# Altium PCB Projekat.PcbDoc
Units mm, origin at the board's own origin, x right, y up, seen from the top; angles counter-clockwise.
Board outline 89.78 x 109.95 mm, 2 copper layers (F.Cu, B.Cu); 68 components, 66 nets, 222 pads, 20 vias.
Unrouted connection lines stored in the file: 3.
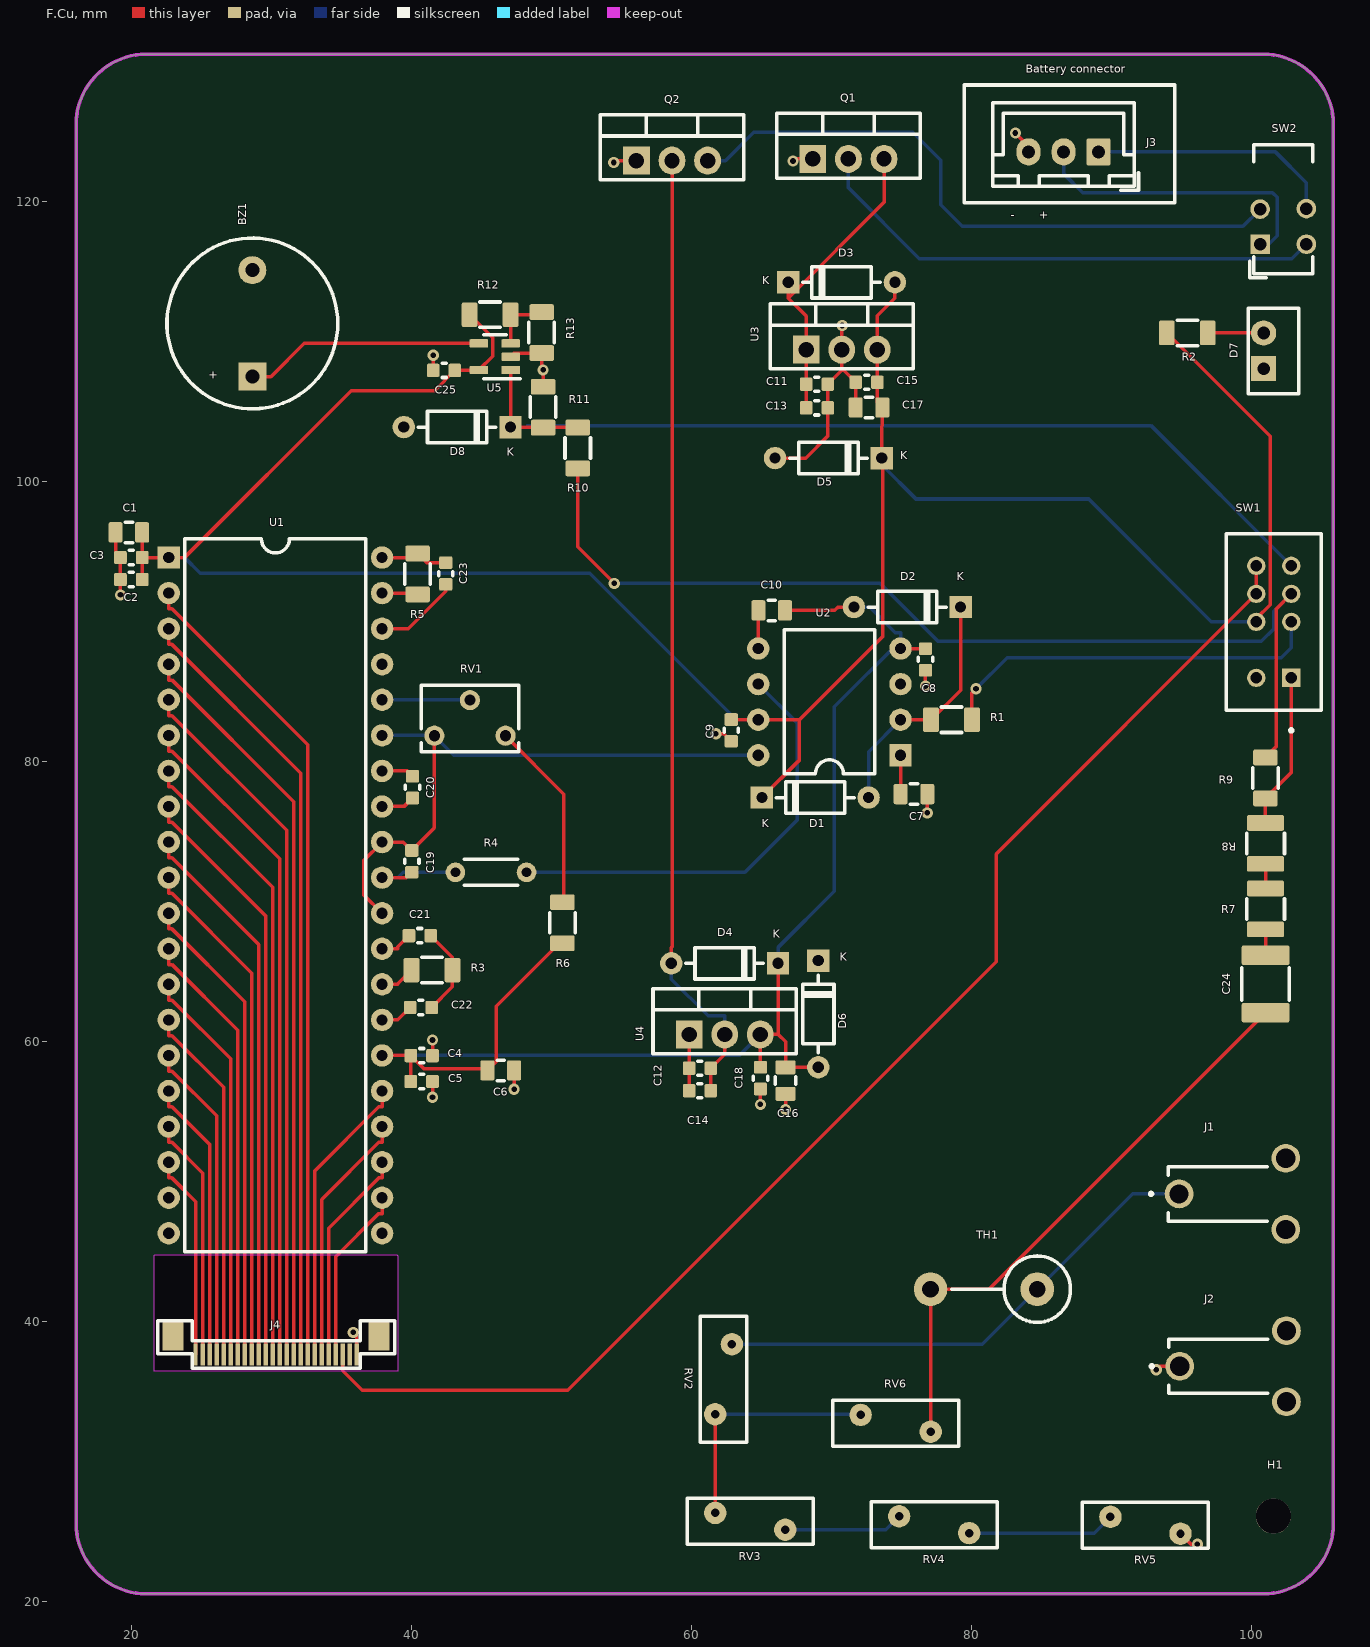
[diagram p0: F.Cu view]
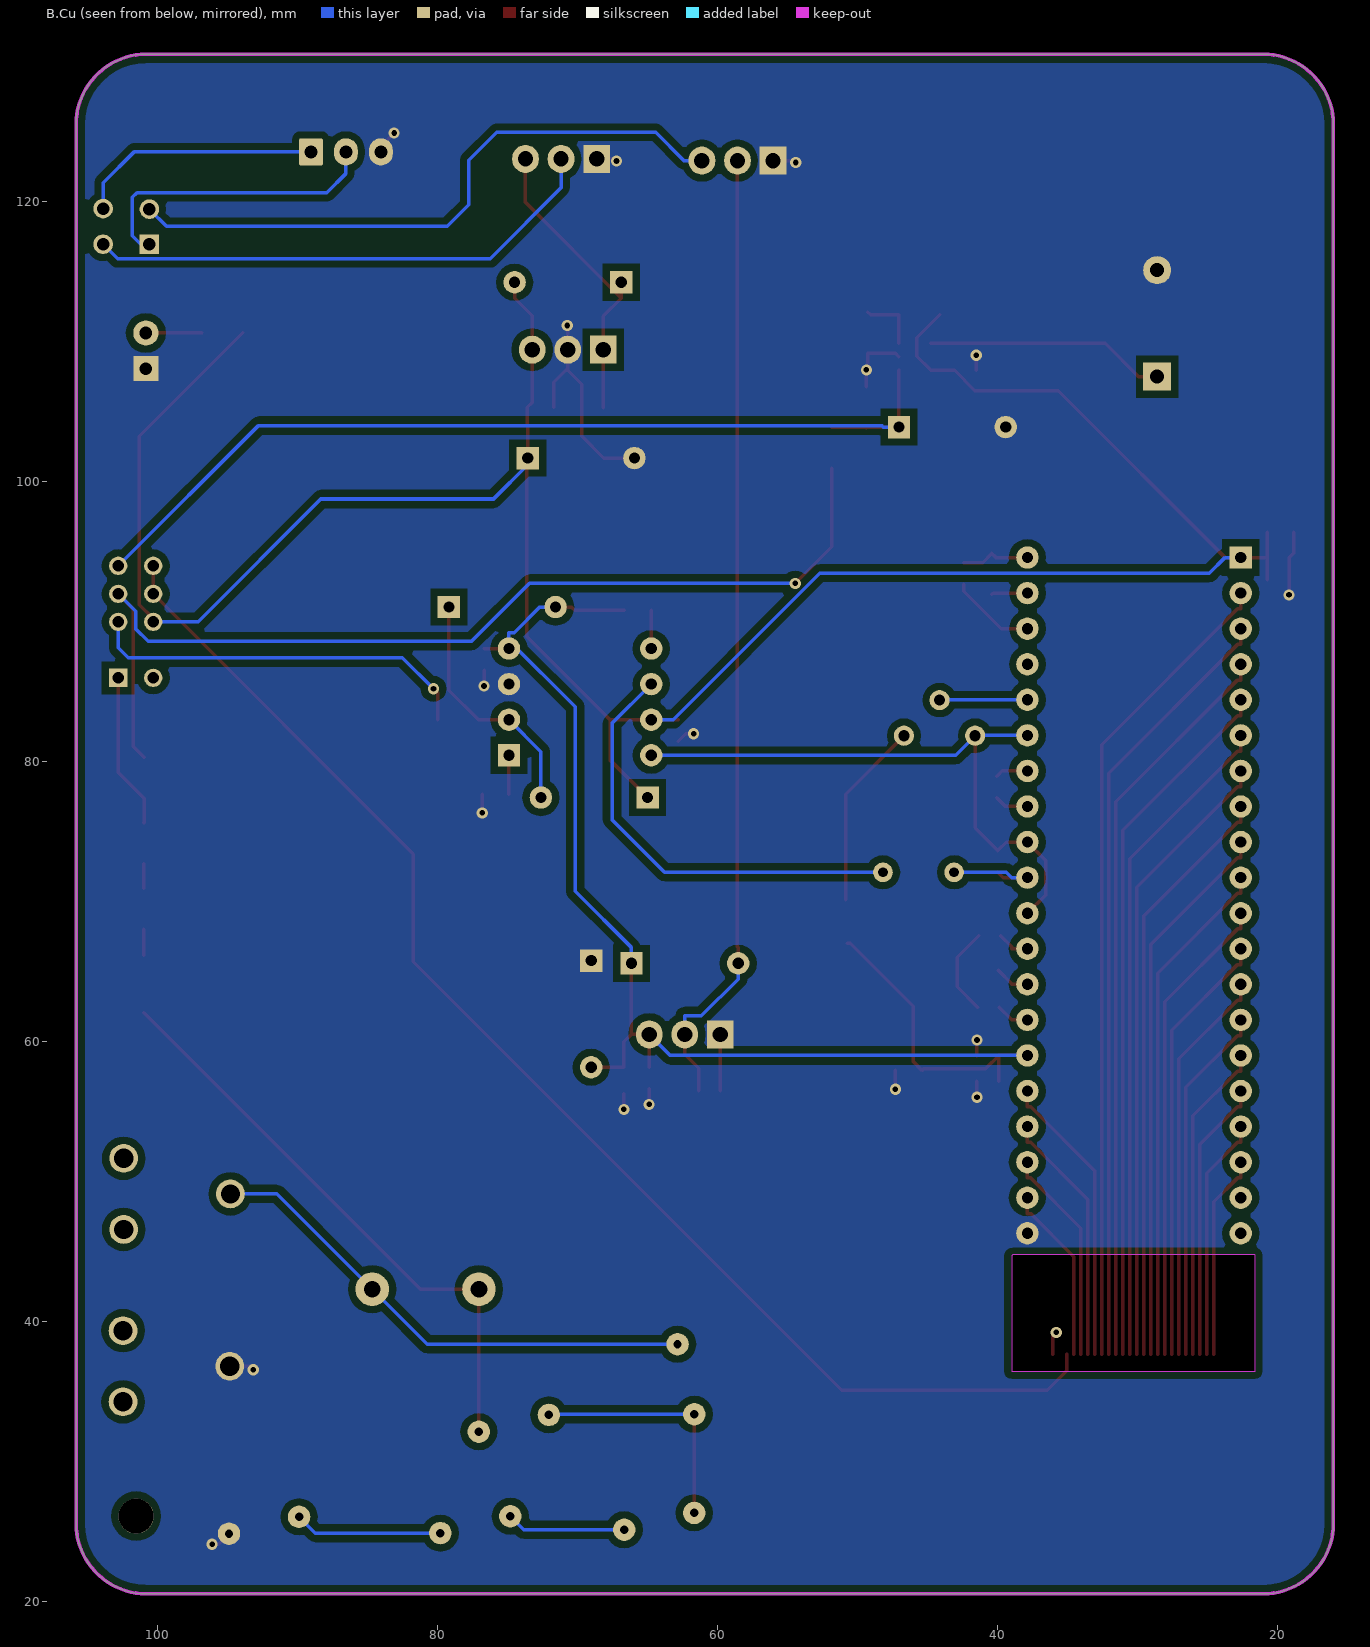
[diagram p1: B.Cu view, seen from below]

## Layer stack, top to bottom
F.Mask: solder mask 0.0102, Solder Resist, Dk 3.5
F.Cu: signal copper 0.0356
Dielectric 1: dielectric 0.32, FR-4, Dk 4.8
B.Cu: signal copper 0.0356
B.Mask: solder mask 0.0102, Solder Resist, Dk 3.5

## Board outline
100.825,20.55 ccw(c100.825,25.55) 105.825,25.55 105.825,125.5 ccw(c100.825,125.5) 100.825,130.5 21.05,130.5 ccw(c21.05,125.5) 16.05,125.5 16.05,25.55 ccw(c21.05,25.55) 21.05,20.55 100.825,20.55
cut-out: 21.63,36.43 21.63,44.73 21.655,44.755 38.955,44.755 39.03,44.68 39.03,36.43

## Design rules (kind name [scope] priority, off if disabled: settings)
Clearance "Clearence 0.508_Polygon" [InNamedPolygon('B.Cu-GND')] p1: gap=0.508 ignorepadtopadclearanceinfootprint=FALSE
MinimumSolderMaskSliver [All] p1: minsoldermaskwidth=0
PolygonConnect Polygon_B.Cu-GND_ConnectDirect [IsNamedPolygon('B.Cu-GND')] p1: connectstyle=Direct reliefconductorwidth=0.254 reliefentries=4 polygonreliefangle="90 Angle" airgapwidth=0.254
RoutingVias [All] p1: holewidth=0.711 width=1.27 viastyle="Through Hole" minholewidth=0.711 minwidth=1.27 maxholewidth=0.711 maxwidth=1.27
SilkToSilkClearance [All] p1: silktosilkclearance=0
SilkToSolderMaskClearance [IsPad] p1: minsilkscreentomaskgap=0 clearancetoexposedcopper=TRUE
SolderMaskExpansion [All] p1: expansion=0.102 istentingtop=FALSE
Width [All] p1: maxlimit=10 minlimit=0.254 preferedwidth=0.254 minimp=50.000000 maximp=50.000000 favimp=50.000000
27 further rules are at their usual default settings.

## Components (designator, comment, footprint, x,y, rotation, side; value= is the part's Value field where it differs from the comment)
BZ1 "Buzzer" Buzzer_12x9.5RM7.6 28.63,107.475 r90 top
C1 "10u" C_0805_2012Metric 19.81,96.352 r180 top
C2 "100n" C_0603_1608Metric 19.985,92.983 r180 top
C3 "100n" C_0603_1608Metric 19.985,94.553 r180 top
C4 "100n" C_0603_1608Metric 40.72,58.983 r180 top
C5 "100n" C_0603_1608Metric 40.72,57.138 r180 top
C6 "10u" C_0805_2012Metric 46.37,57.925 r180 top
C7 "10u" C_0805_2012Metric 75.88,77.66 r0 top
C8 "100n" C_0603_1608Metric 76.7,87.275 r270 top
C9 "100n" C_0603_1608Metric 62.83,82.21 r270 top
C10 "3u3" C_0805_2012Metric 65.72,90.78 r0 top
C11 "100u" C_0603_1608Metric 68.95,106.935 r0 top
C12 "100u" C_0603_1608Metric 60.595,58.08 r0 top
C13 "100n" C_0603_1608Metric 68.95,105.245 r0 top
C14 "100n" C_0603_1608Metric 60.595,56.48 r180 top
C15 "100n" C_0603_1608Metric 72.492,107.07 r180 top
C16 "100n" C_0603_1608Metric 64.915,57.375 r270 top
C17 "1u" C_0805_2012Metric 72.67,105.275 r180 top
C18 "1u" C_0805_2012Metric 66.71,57.2 r90 top
C19 "20p" C_0603_1608Metric 40.02,72.857 r90 top
C20 "100n" C_0603_1608Metric 40.07,78.157 r270 top
C21 "470n" C_0603_1608Metric 40.59,67.553 r180 top
C22 "220n" C_0603_1608Metric 40.67,62.423 r0 top
C23 "100p" C_0603_1608Metric 42.44,93.413 r270 top
C24 "22n" C_1812_4532Metric 100.985,64.103 r90 top
C25 "100n" C_0603_1608Metric 42.317,107.92 r180 top
D1 "1N4148" D_DO-35_SOD27_P7.62mm_Horizontal 65.02,77.415 r0 top
D2 "1N4148" D_DO-35_SOD27_P7.62mm_Horizontal 79.21,91.02 r180 top
D3 "1N4448" D_DO-35_SOD27_P7.62mm_Horizontal 66.897,114.21 r0 top
D4 "1N4448" D_DO-35_SOD27_P7.62mm_Horizontal 66.17,65.575 r180 top
D5 "1N4448" D_DO-35_SOD27_P7.62mm_Horizontal 73.58,101.655 r180 top
D6 "1N4448" D_DO-35_SOD27_P7.62mm_Horizontal 69.05,65.77 r270 top
D7 "Power ON" LED_D5.0mm_Horizontal_O6.35mm_Z15.0mm 100.85,108.05 r90 top
D8 "1N5712" D_DO-35_SOD27_P7.62mm_Horizontal 47.068,103.87 r180 top
H1 "MountingHole" MountingHole_2.5mm 101.55,26.1 r0 top
J1 "VAC" TE_350180 94.815,49.11 r0 top
J2 "COMM" TE_350180 94.86,36.8 r0 top
J3 "Battery connector" JST_XH_B3B-XH-A_1x03_P2.50mm_Vertical 89.062,123.52 r180 top
J4 "FPC Connector" FPC_24 30.33,37.643 r180 top
Q1 "IRF4905" TO-220-3_Vertical 68.66,123.02 r0 top
Q2 "IRF4905" TO-220-3_Vertical 56.06,122.9 r0 top
R1 "47K" R_1206_3216Metric 78.56,82.97 r0 top
R2 "330" R_1206_3216Metric 95.402,110.595 r0 top
R3 "47K" R_1206_3216Metric 41.456,65.096 r0 top
R4 "1M" R_Axial_DIN0204_L3.6mm_D1.6mm_P5.08mm_Horizontal 43.13,72.075 r0 top
R5 "100K" R_1206_3216Metric 40.43,93.383 r90 top
R6 "24K" R_1206_3216Metric 50.77,68.475 r90 top
R7 "9M" R_1210_3225Metric 100.985,69.465 r90 top
R8 "900K" R_1210_3225Metric 100.985,74.14 r270 top
R9 "90K" R_1206_3216Metric 100.975,78.812 r90 top
R10 "9K" R_1206_3216Metric 51.868,102.383 r90 top
R11 "1K" R_1206_3216Metric 49.392,105.295 r90 top
R12 "11K" R_1206_3216Metric 45.605,111.895 r0 top
R13 "1K5" R_1206_3216Metric 49.292,110.62 r270 top
RV1 "Naponska referenca (100mV)" Potentiometer_Bourns_3266W_Vertical 41.63,81.83 r180 top
RV2 "910V" RV_Disc_D9mm_W3.3mm_P5mm 62.88,38.375 r270 top
RV3 "910V" RV_Disc_D9mm_W3.3mm_P5mm 61.69,26.325 r0 top
RV4 "910V" RV_Disc_D9mm_W3.3mm_P5mm 74.82,26.085 r0 top
RV5 "910V" RV_Disc_D9mm_W3.3mm_P5mm 89.91,26.045 r0 top
RV6 "910V" RV_Disc_D9mm_W3.3mm_P5mm 77.07,32.125 r180 top
SW1 "Range selection" SW_EG2310 101.575,89.962 r90 top
SW2 "Power ON/OFF" SW_CuK_JS202011AQN_DPDT_Angled 100.599,116.929 r90 top
TH1 "PTC" R_Axial_DIN0414_L11.9mm_D4.5mm_P7.62mm_Vertical 84.685,42.305 r180 top
U1 "ICL7107CPL" DIP-40_W15.24mm 22.655,94.555 r0 top
U2 "AD737" DIP-8_W10.16mm 74.92,80.435 r180 top
U3 "L7805" TO-220-3_Vertical 68.18,109.395 r0 top
U4 "L7905" TO-220-3_Vertical 59.82,60.495 r0 top
U5 "MAX9075" SOT-23-5 45.942,108.895 r180 top

## Footprints (in the part's own frame and the unit in brackets; to place one, negate y for a bottom-side part, rotate by r counter-clockwise, add the part's x,y. Pads: shape width x height; smd on the part's side, far side on the other; paste and mask are expansions set on the pad)
Buzzer_12x9.5RM7.6 [mm]
  rect 2x2 hole 1 paste-2539.97 mask+0: 1(0,0)
  round 2 hole 1 paste-2539.97 mask+0: 2(7.6,0)
  silkscreen extent -2.3,-6.1 9.9,6.1
C_0603_1608Metric [mm]
  rrect25% 0.9x0.95 smd mask+0: 1(-0.775,0) 2(0.775,0)
  silkscreen extent -0.14,-0.51 0.14,0.51
C_0805_2012Metric [mm]
  rrect25% 1x1.45 smd mask+0: 1(-0.95,0) 2(0.95,0)
  silkscreen extent -0.26,-0.73 0.26,0.73
C_1812_4532Metric [mm]
  rrect18% 1.4x3.4 smd mask+0: 1(-2.05,0) 2(2.05,0)
  silkscreen extent -1.16,-1.71 1.16,1.71
D_DO-35_SOD27_P7.62mm_Horizontal [mm]
  rect 1.6x1.6 hole 0.8 paste-2539.97 mask+0: 1(0,0)
  rrect100% 1.6x1.6 hole 0.8 paste-2539.97 mask+0: 2(7.62,0)
  silkscreen extent 1.04,-1.12 6.58,1.12
DIP-8_W10.16mm [mm]
  rect 1.6x1.6 hole 0.8 paste-2539.97 mask+0: 1(0,0)
  rrect100% 1.6x1.6 hole 0.8 paste-2539.97 mask+0: 2(0,-2.54) 3(0,-5.08) 4(0,-7.62) 5(10.16,-7.62) 6(10.16,-5.08) 7(10.16,-2.54) 8(10.16,0)
  silkscreen extent 1.85,-8.95 8.31,1.33
DIP-40_W15.24mm [mm]
  rect 1.6x1.6 hole 0.8 paste-2539.97 mask+0: 1(0,0)
  rrect100% 1.6x1.6 hole 0.8 paste-2539.97 mask+0: 2(0,-2.54) 3(0,-5.08) 4(0,-7.62) 5(0,-10.16) 6(0,-12.7) 7(0,-15.24) 8(0,-17.78) 9(0,-20.32) 10(0,-22.86) 11(0,-25.4) 12(0,-27.94) 13(0,-30.48) 14(0,-33.02) 15(0,-35.56) 16(0,-38.1) 17(0,-40.64) 18(0,-43.18) 19(0,-45.72) 20(0,-48.26) 21(15.24,-48.26) 22(15.24,-45.72) 23(15.24,-43.18) 24(15.24,-40.64) 25(15.24,-38.1) 26(15.24,-35.56) 27(15.24,-33.02) 28(15.24,-30.48) 29(15.24,-27.94) 30(15.24,-25.4) 31(15.24,-22.86) 32(15.24,-20.32) 33(15.24,-17.78) 34(15.24,-15.24) 35(15.24,-12.7) 36(15.24,-10.16) 37(15.24,-7.62) 38(15.24,-5.08) 39(15.24,-2.54) 40(15.24,0)
  silkscreen extent 1.16,-49.59 14.08,1.33
FPC_24 [mm]
  rect 1.5x2 smd mask+0: 0(-7.35,-1.3) 0(7.35,-1.3)
  rect 0.3x1.6 smd mask+0: 1(-5.75,0) 2(-5.25,0) 3(-4.75,0) 4(-4.25,0) 5(-3.75,0) 6(-3.25,0) 7(-2.75,0) 8(-2.25,0) 9(-1.75,0) 10(-1.25,0) 11(-0.75,0) 12(-0.25,0) 13(0.25,0) 14(0.75,0) 15(1.25,0) 16(1.75,0) 17(2.25,0) 18(2.75,0) 19(3.25,0) 20(3.75,0) 21(4.25,0) 22(4.75,0) 23(5.25,0) 24(5.75,0)
  silkscreen extent -8.46,-2.42 8.46,0.98
JST_XH_B3B-XH-A_1x03_P2.50mm_Vertical [mm]
  rrect15% 1.7x1.95 hole 0.95 paste-2539.97 mask+0: 1(0,0)
  rrect100% 1.7x1.95 hole 0.95 paste-2539.97 mask+0: 2(2.5,0) 3(5,0)
  silkscreen extent -2.85,-3.51 7.56,2.75
LED_D5.0mm_Horizontal_O6.35mm_Z15.0mm [mm]
  rect 1.8x1.8 hole 0.9 paste-2539.97 mask+0: 1(0,0)
  round 1.8 hole 0.9 paste-2539.97 mask+0: 2(2.54,0)
  silkscreen extent -1.8,-2.5 4.3,1.1
MountingHole_2.5mm [mm]
  round 2.5 hole 2.5 paste-2539.97 mask+0: Un1(0,0)
Potentiometer_Bourns_3266W_Vertical [mm]
  round 1.44 hole 0.8 paste-2539.97 mask+0: 1(0,0) 2(-2.54,-2.54) 3(-5.08,0)
  silkscreen extent -6.01,-3.6 0.93,1.14
R_1206_3216Metric [mm]
  rrect22% 1.125x1.75 smd mask+0: 1(-1.462,0) 2(1.462,0)
  silkscreen extent -0.73,-0.91 0.73,0.91
R_1210_3225Metric [mm]
  rrect22% 1.125x2.65 smd mask+0: 1(-1.462,0) 2(1.462,0)
  silkscreen extent -0.72,-1.36 0.72,1.36
R_Axial_DIN0204_L3.6mm_D1.6mm_P5.08mm_Horizontal [mm]
  round 1.4 hole 0.7 paste-2539.97 mask+0: 1(0,0)
  rrect100% 1.4x1.4 hole 0.7 paste-2539.97 mask+0: 2(5.08,0)
  silkscreen extent 0.62,-0.92 4.46,0.92
R_Axial_DIN0414_L11.9mm_D4.5mm_P7.62mm_Vertical [mm]
  round 2.4 hole 1.2 paste-2539.97 mask+0: 1(0,0)
  rrect100% 2.4x2.4 hole 1.2 paste-2539.97 mask+0: 2(7.62,0)
  silkscreen extent -2.37,-2.37 6.12,2.37
RV_Disc_D9mm_W3.3mm_P5mm [mm]
  round 1.6 hole 0.6 paste-2539.97 mask+0: 1(0,0) 2(5,-1.2)
  silkscreen extent -2,-2.25 7,1.05
SOT-23-5 [mm]
  rrect25% 1.325x0.6 smd mask+0: 1(-1.138,0.95) 2(-1.138,0) 3(-1.138,-0.95) 4(1.138,-0.95) 5(1.138,0.95)
  silkscreen extent -1.8,-1.56 0.8,1.56
SW_CuK_JS202011AQN_DPDT_Angled [mm]
  rect 1.4x1.4 hole 0.9 paste-2539.97 mask+0: 1(0,0)
  round 1.4 hole 0.9 paste-2539.97 mask+0: 2(2.5,0) 3(2.54,-3.3) 4(0,-3.3)
  silkscreen extent -2.4,-3.75 7.1,0.75
SW_EG2310 [mm]
  rect 1.308x1.308 hole 0.8 paste-2539.97 mask+0.102: 1(-4,-1.25)
  round 1.308 hole 0.8 paste-2539.97 mask+0.102: 2(0,-1.25) 3(2,-1.25) 4(4,-1.25) 5(-4,1.25) 6(0,1.25) 7(2,1.25) 8(4,1.25)
  silkscreen extent -7.85,-3.4 6.3,3.4
TE_350180 [mil]
  round 81 hole 54 paste-99999 mask+4.02: 1(0,0) S1(300,100) S2(300,-100)
  silkscreen extent -83,-76 247,76
TO-220-3_Vertical [mm]
  rect 1.905x2 hole 1.1 paste-2539.97 mask+0: 1(0,0)
  rrect100% 1.905x2 hole 1.1 paste-2539.97 mask+0: 2(2.54,0) 3(5.08,0)
  silkscreen extent -2.58,-1.37 7.66,3.27

## Part data
BZ1: library part Buzzer_12x9.5RM7.6, "Generic Buzzer, D12mm height 9.5mm with RM7.6mm", Sheetfile=Input.kicad_sch, Sheetname=Input, ki_description="Buzzer, polarized", ki_keywords="quartz resonator ceramic"
C1 C6 C10 C17 C18: library part C_0805_2012Metric, "Capacitor SMD 0805 (2012 Metric), square (rectangular) end terminal, IPC_7351 nominal, (Body size source: IPC-SM-782 page 76, https://www.pcb-3d.com/wordpress/wp-content/uploads/ipc-sm-782a_amendment_1_and_2.pdf, https://docs.google.com/spreadsheets/d/1BsfQQcO9C6DZCsRaXUlFlo91Tg2WpOkGARC1WS5S8t0/edit?usp=sharing), generated with kicad-footprint-generator", Rated Voltage=16V
  C1 C6: Sheetfile=Projekat.kicad_sch
  C10: Sheetfile=rmstodc.kicad_sch, Sheetname=RMS-DC
  C17 C18: Sheetfile=VoltageSupply.kicad_sch, Sheetname="Voltage Supply 5V"
C2 C3 C4 C5 C8 C9 C13 C14 C15 C16 C19 C20 C21 C22 C23 C25: library part C_0603_1608Metric, "Capacitor SMD 0603 (1608 Metric), square (rectangular) end terminal, IPC_7351 nominal, (Body size source: IPC-SM-782 page 76, https://www.pcb-3d.com/wordpress/wp-content/uploads/ipc-sm-782a_amendment_1_and_2.pdf), generated with kicad-footprint-generator", ki_description="Unpolarized capacitor", ki_keywords="cap capacitor"
  C2 C3 C4 C5: Sheetfile=Projekat.kicad_sch
  C8 C9: Sheetfile=rmstodc.kicad_sch, Sheetname=RMS-DC
  C13 C14 C15 C16: Sheetfile=VoltageSupply.kicad_sch, Sheetname="Voltage Supply 5V"
  C19 C20 C21 C22 C23: Sheetfile=icl7107pins.kicad_sch, Sheetname=7107-PINS
  C25: Sheetfile=Input.kicad_sch, Sheetname=Input
C7: library part C_0805_2012Metric, "Capacitor SMD 0805 (2012 Metric), square (rectangular) end terminal, IPC_7351 nominal, (Body size source: IPC-SM-782 page 76, https://www.pcb-3d.com/wordpress/wp-content/uploads/ipc-sm-782a_amendment_1_and_2.pdf, https://docs.google.com/spreadsheets/d/1BsfQQcO9C6DZCsRaXUlFlo91Tg2WpOkGARC1WS5S8t0/edit?usp=sharing), generated with kicad-footprint-generator", Sheetfile=rmstodc.kicad_sch, Sheetname=RMS-DC, ki_description="Unpolarized capacitor", ki_keywords="cap capacitor"
C11 C12: library part C_0603_1608Metric, "Capacitor SMD 0603 (1608 Metric), square (rectangular) end terminal, IPC_7351 nominal, (Body size source: IPC-SM-782 page 76, https://www.pcb-3d.com/wordpress/wp-content/uploads/ipc-sm-782a_amendment_1_and_2.pdf), generated with kicad-footprint-generator", Rated Voltage=16V, Sheetfile=VoltageSupply.kicad_sch, Sheetname="Voltage Supply 5V"
C24: library part C_1812_4532Metric, "Capacitor SMD 1812 (4532 Metric), square (rectangular) end terminal, IPC_7351 nominal, (Body size source: IPC-SM-782 page 76, https://www.pcb-3d.com/wordpress/wp-content/uploads/ipc-sm-782a_amendment_1_and_2.pdf), generated with kicad-footprint-generator", Rated Voltage=1200V, Sheetfile=Input.kicad_sch, Sheetname=Input, ki_description="Unpolarized capacitor", ki_keywords="cap capacitor"
D1 D2 D3 D4 D5 D6 D8: library part D_DO-35_SOD27_P7.62mm_Horizontal, "Diode, DO-35_SOD27 series, Axial, Horizontal, pin pitch=7.62mm, , length*diameter=4*2mm^2, , http://www.diodes.com/_files/packages/DO-35.pdf"
  D1 D2: Sheetfile=rmstodc.kicad_sch, Sheetname=RMS-DC, ki_description="100V 0.15A standard switching diode, DO-35", ki_keywords=diode
  D3 D4 D5 D6: Sheetfile=VoltageSupply.kicad_sch, Sheetname="Voltage Supply 5V", ki_description="100V 0.15A High-speed standard diode, DO-35", ki_keywords=diode
  D8: Sheetfile=Input.kicad_sch, Sheetname=Input, ki_description="20V 75mA Schottky diode, DO-35", ki_keywords="diode Schottky"
D7: library part LED_D5.0mm_Horizontal_O6.35mm_Z15.0mm, "LED, diameter 5.0mm z-position of LED center 3.0mm, 2 pins, diameter 5.0mm z-position of LED center 3.0mm, 2 pins, diameter 5.0mm z-position of LED center 3.0mm, 2 pins, diameter 5.0mm z-position of LED center 9.0mm, 2 pins, diameter 5.0mm z-position of LED center 9.0mm, 2 pins, diameter 5.0mm z-position of LED center 9.0mm, 2 pins, diameter 5.0mm z-position of LED center 15.0mm, 2 pins, diameter 5.0mm z-position of LED center 15.0mm, 2 pins, diameter 5.0mm z-position of LED center 15.0mm, 2 pins", Sheetfile=VoltageSupply.kicad_sch, Sheetname="Voltage Supply 5V", ki_description="Light emitting diode", ki_keywords="LED diode"
H1: library part MountingHole_2.5mm, "Mounting Hole 2.5mm, no annular", Sheetfile=Projekat.kicad_sch, ki_description="Mounting Hole without connection", ki_keywords="mounting hole"
J1 J2: library part TE_350180, Sheetfile=Input.kicad_sch, Sheetname=Input, ki_description="Generic connector, single row, 01x01, script generated (kicad-library-utils/schlib/autogen/connector/)", ki_keywords=connector
J3: library part JST_XH_B3B-XH-A_1x03_P2.50mm_Vertical, "JST XH series connector, B3B-XH-A (http://www.jst-mfg.com/product/pdf/eng/eXH.pdf), generated with kicad-footprint-generator", Sheetfile=Battery.kicad_sch, Sheetname=Battery, ki_description="Generic connector, single row, 01x03, script generated (kicad-library-utils/schlib/autogen/connector/)", ki_keywords=connector
J4: library part FPC_24, Sheetfile=ffccon.kicad_sch, Sheetname="FFC Connector", ki_description="Generic connector, single row, 01x24, script generated (kicad-library-utils/schlib/autogen/connector/)", ki_keywords=connector
Q1 Q2 U3 U4: library part TO-220-3_Vertical, "TO-220-3, Vertical, RM 2.54mm, see https://www.vishay.com/docs/66542/to-220-1.pdf"
  Q1 Q2: Sheetfile=Battery.kicad_sch, Sheetname=Battery, ki_description="-74A Id, -55V Vds, Single P-Channel HEXFET Power MOSFET, 20mOhm Ron, TO-220AB", ki_keywords="Single P-Channel HEXFET Power MOSFET"
  U3: Sheetfile=VoltageSupply.kicad_sch, Sheetname="Voltage Supply 5V", ki_description="Positive 1.5A 35V Linear Regulator, Fixed Output 5V, TO-220/TO-263/TO-252", ki_keywords="Voltage Regulator 1.5A Positive"
  U4: Sheetfile=VoltageSupply.kicad_sch, Sheetname="Voltage Supply 5V", ki_description="Negative 1.5A 35V Linear Regulator, Fixed Output -5V, TO-220/TO-263", ki_keywords="Voltage Regulator 1.5A Negative"
R1: library part R_1206_3216Metric, "Resistor SMD 1206 (3216 Metric), square (rectangular) end terminal, IPC_7351 nominal, (Body size source: IPC-SM-782 page 72, https://www.pcb-3d.com/wordpress/wp-content/uploads/ipc-sm-782a_amendment_1_and_2.pdf), generated with kicad-footprint-generator", Power Rating=1W, Sheetfile=rmstodc.kicad_sch, Sheetname=RMS-DC, ki_description="Resistor, US symbol", ki_keywords="R res resistor"
R2 R3 R5 R6 R9 R10 R11 R12 R13: library part R_1206_3216Metric, "Resistor SMD 1206 (3216 Metric), square (rectangular) end terminal, IPC_7351 nominal, (Body size source: IPC-SM-782 page 72, https://www.pcb-3d.com/wordpress/wp-content/uploads/ipc-sm-782a_amendment_1_and_2.pdf), generated with kicad-footprint-generator", ki_description="Resistor, US symbol", ki_keywords="R res resistor"
  R2: Sheetfile=VoltageSupply.kicad_sch, Sheetname="Voltage Supply 5V"
  R3 R5 R6: Sheetfile=icl7107pins.kicad_sch, Sheetname=7107-PINS
  R9 R10 R11 R12 R13: Sheetfile=Input.kicad_sch, Sheetname=Input
R4: library part R_Axial_DIN0204_L3.6mm_D1.6mm_P5.08mm_Horizontal, "Resistor, Axial_DIN0204 series, Axial, Horizontal, pin pitch=5.08mm, 0.167W, length*diameter=3.6*1.6mm^2, http://cdn-reichelt.de/documents/datenblatt/B400/1_4W%23YAG.pdf", Sheetfile=icl7107pins.kicad_sch, Sheetname=7107-PINS, ki_description="Resistor, US symbol", ki_keywords="R res resistor"
R7 R8: library part R_1210_3225Metric, "Resistor SMD 1210 (3225 Metric), square (rectangular) end terminal, IPC_7351 nominal, (Body size source: IPC-SM-782 page 72, https://www.pcb-3d.com/wordpress/wp-content/uploads/ipc-sm-782a_amendment_1_and_2.pdf), generated with kicad-footprint-generator", Sheetfile=Input.kicad_sch, Sheetname=Input, ki_description="Resistor, US symbol", ki_keywords="R res resistor"
RV1: library part Potentiometer_Bourns_3266W_Vertical, "Potentiometer, vertical, Bourns 3266W, https://www.bourns.com/docs/Product-Datasheets/3266.pdf", Sheetfile=icl7107pins.kicad_sch, Sheetname=7107-PINS, Val=100mV, ki_description="Trim-potentiometer, US symbol", ki_keywords="resistor variable trimpot trimmer"
RV2 RV3 RV4 RV5 RV6: library part RV_Disc_D9mm_W3.3mm_P5mm, "Varistor, diameter 9mm, width 3.3mm, pitch 5mm", Sheetfile=Input.kicad_sch, Sheetname=Input, ki_description="Voltage dependent resistor", ki_keywords="VDR resistance"
SW1: library part SW_EG2310, MANUFACTURER=E-Switch, MAXIMUM_PACKAGE_HEIGHT=4.7mm, Package=None, Availability="In Stock", Check_prices=https://www.snapeda.com/parts/EG2310/E-Switch/view-part/?ref=eda, Description="\nSlide Switch DP3T Through Hole, Right Angle\n", MF=E-Switch, MP=EG2310, PARTREV=-, Price=None, Purchase-URL=https://www.snapeda.com/api/url_track_click_mouser/?unipart_id=396456&manufacturer=E-Switch&part_name=EG2310&search_term=None, SNAPEDA_PN=EG2310, STANDARD="Manufacturer Recommendations", Sheetfile=Input.kicad_sch, Sheetname=Input, SnapEDA_Link=https://www.snapeda.com/parts/EG2310/E-Switch/view-part/?ref=snap
SW2: library part SW_CuK_JS202011AQN_DPDT_Angled, "CuK sub miniature slide switch, JS series, DPDT, right angle, http://www.ckswitches.com/media/1422/js.pdf", Sheetfile=Battery.kicad_sch, Sheetname=Battery, ki_description="Double Pole Single Throw (DPST) Switch", ki_keywords="switch dual double-pole single-throw OFF-ON"
TH1: library part R_Axial_DIN0414_L11.9mm_D4.5mm_P7.62mm_Vertical, "Resistor, Axial_DIN0414 series, Axial, Vertical, pin pitch=7.62mm, 2W, length*diameter=11.9*4.5mm^2, http://www.vishay.com/docs/20128/wkxwrx.pdf", Sheetfile=Input.kicad_sch, Sheetname=Input, ki_description="Thermistor, temperature dependent resistor, US symbol", ki_keywords="R res thermistor"
U1: library part DIP-40_W15.24mm, "40-lead though-hole mounted DIP package, row spacing 15.24 mm (600 mils)", Sheetfile=Projekat.kicad_sch, ki_description="3 1/2 Digit, LED Display, A/D Converter, DIP-40", ki_keywords="LED ADC"
U2: library part DIP-8_W10.16mm, "8-lead though-hole mounted DIP package, row spacing 10.16 mm (400 mils)", Sheetfile=rmstodc.kicad_sch, Sheetname=RMS-DC
U5: library part SOT-23-5, "SOT, 5 Pin (https://www.jedec.org/sites/default/files/docs/Mo-178c.PDF variant AA), generated with kicad-footprint-generator ipc_gullwing_generator.py", Sheetfile=Input.kicad_sch, Sheetname=Input, ki_description="Single, 1.8V Low Power, Rail-to-Rail Input, Push-Pull Output Comparator, SOT-23-5/SC-70-5", ki_keywords=cmp

## Via types
v1: diameter 0.8, hole 0.4, F.Cu to B.Cu, tented both sides, 20 vias

## Nets (pads, with @x,y where several pads share a name; then routed paths per layer and width w, separated by ;. In a path a pad name is that pad's centre, name@x,y a point inside that pad or via, vN(x,y) a via of type N, cw(c..) or ccw(c..) an arc to the next point about the centre after c; other vN are vias at no path point)
20V_RANGE: J4.2 SW1.5
1000V_RANGE: J4.3 SW1.7 SW1.8 | length 97
  F.Cu w0.25: J4.3 35.08,36.49 36.485,35.086 51.141,35.086 81.742,65.687 81.742,73.38 SW1.7 SW1.8
+5V: C1.1 C2.1 C3.1 C9.1 C15.1 C17.1 C25.1 D1.1 D3.2 D5.1 R2.1 R12.1 SW1.6 U1.1 U2.7 U3.3 U5.5 | length 186.8
  F.Cu w0.25: C2.1 C3.1 C3.1@20.763,94.555 ; C1.1 20.763,96.35 C3.1@20.763,94.555 ; R12.1 45.799,110.238 45.799,108.939 U5.5 43.118,107.945 C25.1 41.642,106.47 35.696,106.47 23.782,94.555 U1.1 C3.1@20.763,94.555 ; C9.1 62.84,82.975 U2.7 67.7,82.975 ; D1.1 67.7,80.095 67.7,82.975 ; D3.2 74.517,113.083 73.26,111.826 U3.3 73.26,108.068 73.267,108.061 C15.1 73.267,105.628 C17.1 73.62,103.984 73.58,103.944 D5.1 73.638,101.598 73.638,88.912 67.7,82.975 ; R2.1 101.316,103.219 101.316,91.195 100.325,90.204 SW1.6
  B.Cu w0.25: U1.1 23.782,94.555 24.909,93.428 52.726,93.428 63.179,82.975 63.633,82.975 U2.7 ; D5.1 73.58,101.175 76.02,98.735 88.35,98.735 97.123,89.962 SW1.6
+9V: C11.1 C13.1 D3.1 Q1.3 U3.1 | length 22.3
  F.Cu w0.25: D3.1 66.897,113.083 ; C13.1 C11.1 68.175,108.063 68.18,108.068 U3.1 68.18,111.801 66.897,113.083 ; Q1.3 73.74,119.926 66.897,113.083
-5V: C4.2 C5.2 C6.2 C8.1 C10.2 C16.1 C18.2 D2.2 D4.1 D6.2 R6.1 U1.26 U2.4 U4.3 | length 101.2
  F.Cu w0.25: U1.26 39.933,58.995 C4.2 ; C5.2 C4.2 ; R6.1 50.558,67.012 46.057,62.513 46.057,58.562 C6.2 45.285,58.06 40.868,58.06 C4.2 ; C16.1 64.9,58.165 U4.3 66.179,60.495 ; D4.1 66.17,64.448 66.179,64.439 66.179,60.495 ; C10.2 70.223,90.78 70.463,91.02 D2.2 ; D6.2 C18.2 66.71,59.964 66.179,60.495 ; U2.4 76.695,88.055 C8.1
  B.Cu w0.25: U1.26 63.4,58.995 U4.3 ; D4.1 66.17,66.702 70.19,70.722 70.19,83.889 U2.4@74.92,88.618 ; D2.2 72.717,91.02 74.555,89.182 74.92,89.182 U2.4@74.92,88.618 ; U2.4 U2.4@74.92,88.618
-9V: C12.2 C14.1 D4.2 Q2.2 U4.2 | length 69.1
  F.Cu w0.25: D4.2 58.55,66.702 58.6,66.752 Q2.2 ; C14.1 C12.2 62.36,59.07 U4.2
  B.Cu w0.25: D4.2 58.55,64.448 61.176,61.822 62.36,61.822 U4.2
A-Z: C21.2 U1.29 | length 2.4
  F.Cu w0.25: U1.29 39.022,66.615 39.022,66.759 C21.2
AD737_COM: C19.2 RV1.1 U1.30 U1.32 U1.35 U2.8 | length 44.8
  F.Cu w0.25: U1.30 36.6,70.45 36.6,72.94 U1.32 39.418,74.235 C19.2 41.63,75.243 RV1.1
  B.Cu w0.25: U1.35 41.605,81.855 RV1.1 43.025,80.435 U2.8
AD737_OUTPUT: R4.2 U2.6 | length 31.8
  B.Cu w0.25: R4.2 63.81,72.075 67.56,75.825 67.56,82.715 U2.6
BUFF: R3.1 U1.28 | length 2.6
  F.Cu w0.25: U1.28 39.022,64.075 39.022,64.124 R3.1
Cc: C7.1 U2.1 | length 2.8
  F.Cu w0.25: U2.1 74.92,79.308 74.93,79.298 C7.1
CREF+: C20.1 U1.34 | length 2.3
  F.Cu w0.25: U1.34 39.688,79.315 C20.1
CREF-: C20.2 U1.33 | length 2.4
  F.Cu w0.25: U1.33 39.462,76.775 C20.2
GND: BZ1.2 C1.2 C2.2 C3.2 C4.1 C5.1 C6.1 C7.2 C8.2 C9.2 C11.2 C12.1 C13.2 C14.2 C15.2 C16.2 C17.2 C18.1 C25.2 D5.2 D6.1 D7.1 D8.2 J2.1 J3.3 J4.1 Q1.1 Q2.1 R11.2 R13.2 RV5.2 U1.21 U2.3 U3.2 U4.1 U5.2 | length 49.8
  F.Cu w0.25: C1.2 18.86,94.903 C3.2 C2.2 v1(19.21,91.884) ; v1(35.84,39.215) 36.08,38.975 J4.1 ; v1(41.495,56.012) C5.1 ; C4.1 v1(41.495,60.101) ; C25.2 v1(41.543,108.999) ; U5.2 47.343,109.158 R13.2 49.292,108.058 v1(49.392,107.958) R11.2 ; v1(47.32,56.581) C6.1 ; v1(54.44,122.765) 54.575,122.9 Q2.1 ; C14.2 C12.1 U4.1 ; v1(61.731,81.977) 62.288,81.977 C9.2 ; v1(64.915,55.498) C16.2 ; D5.2 68.15,101.655 69.725,103.23 C13.2 C11.2 70.72,107.93 ; v1(66.71,55.14) C18.1 ; v1(67.24,122.875) 67.385,123.02 Q1.1 ; v1(70.75,111.125) 70.72,111.095 U3.2 70.72,107.93 ; C17.2 71.717,105.278 C15.2 70.858,107.93 70.72,107.93 ; v1(76.7,85.379) C8.2 ; v1(76.83,76.315) C7.2 ; v1(83.12,124.875) 84.062,123.933 J3.3 ; v1(93.18,36.555) 93.425,36.8 J2.1 ; RV5.2 95.66,24.095 v1(96.12,24.095)
ICL7107_A1: J4.11 U1.5 | length 50.4
  F.Cu w0.25: U1.5 22.655,83.268 22.888,83.268 31.08,75.077 J4.11
ICL7107_A2: J4.18 U1.12 | length 31.1
  F.Cu w0.25: U1.12 22.655,65.488 22.888,65.488 27.58,60.797 27.58,38.769 J4.18
ICL7107_A3: J4.5 U1.23 | length 15.4
  F.Cu w0.25: J4.5 34.08,46.667 37.661,50.248 37.895,50.248 U1.23
ICL7107_AB4: U1.19
ICL7107_B1: J4.10 U1.4 | length 53.1
  F.Cu w0.25: U1.4 22.655,85.808 22.888,85.808 31.58,77.117 J4.10
ICL7107_B2: J4.17 U1.11 | length 33.9
  F.Cu w0.25: U1.11 22.655,68.028 22.888,68.028 28.08,62.837 J4.17
ICL7107_B3: J4.22 U1.16 | length 20.2
  F.Cu w0.25: U1.16 22.655,55.328 22.888,55.328 25.58,52.637 J4.22
ICL7107_C1: J4.9 U1.3 | length 55.9
  F.Cu w0.25: U1.3 22.655,88.348 22.888,88.348 32.08,79.157 J4.9
ICL7107_C2: J4.16 U1.10 | length 36.6
  F.Cu w0.25: U1.10 22.655,70.568 22.888,70.568 28.58,64.877 J4.16
ICL7107_C3: J4.6 U1.24 | length 18.2
  F.Cu w0.25: J4.6 33.58,48.707 37.661,52.788 37.895,52.788 U1.24
ICL7107_D1: J4.8 U1.2 | length 58.6
  F.Cu w0.25: U1.2 22.655,90.888 22.888,90.888 32.58,81.197 J4.8
ICL7107_D2: J4.15 U1.9 | length 39.4
  F.Cu w0.25: U1.9 22.655,73.108 22.888,73.108 29.08,66.917 J4.15
ICL7107_D3: J4.21 U1.15 | length 22.9
  F.Cu w0.25: U1.15 22.655,57.868 22.888,57.868 26.08,54.677 J4.21
ICL7107_E1: J4.14 U1.8 | length 42.1
  F.Cu w0.25: U1.8 22.655,75.648 22.888,75.648 29.58,68.957 J4.14
ICL7107_E2: J4.20 U1.14 | length 25.7
  F.Cu w0.25: U1.14 22.655,60.408 22.888,60.408 26.58,56.717 26.58,38.769 J4.20
ICL7107_E3: J4.24 U1.18 | length 14.7
  F.Cu w0.25: U1.18 22.655,50.248 22.888,50.248 24.58,48.557 24.58,38.769 J4.24
ICL7107_F1: J4.12 U1.6 | length 47.6
  F.Cu w0.25: U1.6 22.655,80.728 22.888,80.728 30.58,73.037 J4.12
ICL7107_F2: J4.19 U1.13 | length 28.4
  F.Cu w0.25: U1.13 22.655,62.948 22.888,62.948 27.08,58.757 27.08,38.769 J4.19
ICL7107_F3: J4.23 U1.17 | length 17.4
  F.Cu w0.25: U1.17 22.655,52.788 22.888,52.788 25.08,50.597 J4.23
ICL7107_G1: J4.13 U1.7 | length 44.9
  F.Cu w0.25: U1.7 22.655,78.188 22.888,78.188 30.08,70.997 J4.13
ICL7107_G2: J4.7 U1.25 | length 20.9
  F.Cu w0.25: J4.7 33.08,50.747 37.661,55.328 37.895,55.328 U1.25
ICL7107_G3: J4.4 U1.22 | length 12.7
  F.Cu w0.25: J4.4 34.58,44.627 37.661,47.708 37.895,47.708 U1.22
IN_HI: C19.1 R4.1 U1.31 | length 7.7
  F.Cu w0.25: U1.31 39.632,71.695 C19.1
  B.Cu w0.25: U1.31 39.022,71.695 39.402,72.075 R4.1
INT: C22.1 U1.27 | length 2.4
  F.Cu w0.25: U1.27 39.022,61.535 39.022,61.549 C22.1
Net-(BZ1--): BZ1.1 U5.4 | length 17.2
  F.Cu w0.25: BZ1.1 29.957,107.475 32.327,109.845 U5.4
Net-(C21-Pad1): C21.1 C22.2 R3.2 | length 6.4
  F.Cu w0.25: C21.1 42.918,65.999 R3.2 42.918,63.896 C22.2
Net-(C24-Pad1): C24.1 RV6.1 TH1.2 | length 42.3
  F.Cu w0.25: TH1.2 TH1.2@77.07,42.305 ; RV6.1 TH1.2@77.07,42.305 ; C24.1 81.238,42.305 TH1.2@77.07,42.305
Net-(C24-Pad2): C24.2 R7.1 | length 1.9
  F.Cu w0.25: C24.2 R7.1
Net-(D1-A): D1.2 D2.1 R1.1 U2.2 | length 17.6
  F.Cu w0.25: U2.2 77.093,82.975 R1.1 79.21,85.082 D2.1
  B.Cu w0.25: D1.2 72.64,80.695 U2.2
Net-(D7-A): D7.2 R2.2 | length 4
  F.Cu w0.25: R2.2 96.87,110.59 D7.2
Net-(J1-Pin_1): J1.1 RV2.1 TH1.1 | length 36.4
  B.Cu w0.25: RV2.1 80.755,38.375 TH1.1 91.49,49.11 J1.1
Net-(J3-Pin_1): J3.1 SW2.3 | length 17.6
  B.Cu w0.25: J3.1 101.695,123.52 103.899,121.316 SW2.3
Net-(J3-Pin_2): J3.2 SW2.1 | length 21.7
  B.Cu w0.25: J3.2 86.562,121.983 87.93,120.615 101.48,120.615 101.82,120.275 101.82,117.535 101.214,116.929 SW2.1
Net-(Q1-D): Q1.2 SW2.4 | length 37.3
  B.Cu w0.25: Q1.2 71.2,120.955 76.262,115.893 102.862,115.893 SW2.4
Net-(Q2-S): Q2.3 SW2.2 | length 45.4
  B.Cu w0.25: Q2.3 62.419,122.9 64.434,124.915 75.8,124.915 77.79,122.925 77.79,119.745 79.33,118.205 99.375,118.205 SW2.2
Net-(R6-Pad2): R6.2 RV1.3 | length 13.4
  F.Cu w0.25: RV1.3 50.878,77.663 R6.2@50.878,70.125
Net-(R7-Pad2): R7.2 R8.2 | length 1.7
  F.Cu w0.25: R7.2 R8.2
Net-(R8-Pad1): R8.1 R9.1 SW1.1 | length 11.1
  F.Cu w0.25: R8.1 100.975,75.613 R9.1 102.825,79.2 SW1.1
Net-(R10-Pad1): R9.2 R10.1 SW1.3 | length 74
  F.Cu w0.25: R10.1 51.868,95.314 v1(54.474,92.708) ; R9.2 101.734,81.034 101.734,90.872 SW1.3
  B.Cu w0.25: v1(54.474,92.708) 73.451,92.708 77.593,88.565 100.69,88.565 101.575,89.45 101.575,90.713 SW1.3
Net-(RV2-Pad2): RV2.2 RV3.1 RV6.2 | length 17.5
  F.Cu w0.25: RV2.2 61.69,33.365 RV3.1
  B.Cu w0.25: RV2.2 72.02,33.375 RV6.2
Net-(RV3-Pad2): RV3.2 RV4.1 | length 8.5
  B.Cu w0.25: RV3.2 73.86,25.125 RV4.1
Net-(RV4-Pad2): RV4.2 RV5.1 | length 10.6
  B.Cu w0.25: RV4.2 88.75,24.885 RV5.1
Net-(U2-Cav): C10.1 U2.5 | length 2.7
  F.Cu w0.25: U2.5 64.76,89.182 64.77,89.192 C10.1
Net-(U5--): R12.2 R13.1 U5.3 | length 4.4
  F.Cu w0.25: R12.2 R12.2@47.08,111.882 ; U5.3 R12.2@47.08,111.882 ; R13.1 49.093,111.882 R12.2@47.08,111.882
OSC1: C23.1 R5.2 U1.40 | length 4.9
  F.Cu w0.25: U1.40 40.14,94.555 R5.2 41.087,94.188 C23.1
OSC2: R5.1 U1.39 | length 2.6
  F.Cu w0.25: U1.39 40.335,92.015 R5.1
OSC3: C23.2 U1.38 | length 6.1
  F.Cu w0.25: U1.38 39.757,89.475 42.44,92.158 C23.2
REF_HI: RV1.2 U1.36 | length 6.3
  B.Cu w0.25: U1.36 44.145,84.395 RV1.2
Threshold_voltage: D8.1 R10.2 R11.1 SW1.4 U5.1 | length 68.9
  F.Cu w0.25: U5.1 47.068,107.932 D8.1 49.355,103.87 R11.1 49.405,103.845 R10.2
  B.Cu w0.25: D8.1 48.194,103.87 48.306,103.982 92.806,103.982 SW1.4
unconnected-(U1-POL-Pad20): U1.20
unconnected-(U1-TEST-Pad37): U1.37
Vin: R1.2 SW1.2 | length 27.9
  F.Cu w0.25: R1.2 80.02,82.973 80.02,84.895 v1(80.31,85.185)
  B.Cu w0.25: v1(80.31,85.185) 82.53,87.405 102.12,87.405 102.825,88.11 SW1.2
pads on no net: H1.Un1 J1.S1 J1.S2 J2.S1 J2.S2 J4.0

## Polygon pours and split planes (outlines as drawn)
GND on B.Cu "B.Cu-GND" (solid, remove dead copper, pour order 0): 144.075,0.9 14.25,0 14.05,132.2 13.95,132.2 144.075,132.6

## Keep-outs
F.Cu:
  region: 39.03,44.68 39.03,36.43 21.63,36.43 21.63,44.73 21.655,44.755 38.955,44.755
Edge.Cuts:
  dashed: 39.03,44.68 39.03,36.43 21.63,36.43 21.63,44.73 21.655,44.755 38.955,44.755
  lines w0: 16.05,25.55 ccw(c21.05,25.55) 21.05,20.55 100.825,20.55 ccw(c100.825,25.55) 105.825,25.55 105.825,125.5 ccw(c100.825,125.5) 100.825,130.5 21.05,130.5 ccw(c21.05,125.5) 16.05,125.5 16.05,25.55
  lines w0.254: 16.05,25.55 ccw(c21.05,25.55) 21.05,20.55 100.825,20.55 ccw(c100.825,25.55) 105.825,25.55 105.825,125.5 ccw(c100.825,125.5) 100.825,130.5 21.05,130.5 ccw(c21.05,125.5) 16.05,125.5 16.05,25.55

## Silkscreen, mask and mechanical layers (free items; w line width, h text height)
F.SilkS:
  lines w0.254: 79.483,119.9 94.5,119.9 94.5,128.3 79.483,128.3 79.483,119.9
  text "Battery connector" at 83.865,128.948 h1
  text "-       +" at 82.779,118.539 h1

## Text inside footprints (layer, text, board x,y; h text height)
BZ1: F.Fab "+" at 26.301,107.254 h1 r90; F.SilkS "+" at 26.301,107.254 h1 r90
D1: F.Fab "K" at 64.996,75.075 h1; F.SilkS "K" at 64.996,75.075 h1
D2: F.Fab "K" at 78.946,92.732 h1; F.SilkS "K" at 78.946,92.732 h1
D3: F.Fab "K" at 65.033,113.86 h1; F.SilkS "K" at 65.033,113.86 h1
D4: F.Fab "K" at 65.811,67.193 h1; F.SilkS "K" at 65.811,67.193 h1
D5: F.Fab "K" at 74.916,101.335 h1; F.SilkS "K" at 74.916,101.345 h1
D6: F.Fab "K" at 70.576,65.54 h1; F.SilkS "K" at 70.576,65.54 h1
D8: F.Fab "K" at 46.783,101.61 h1; F.SilkS "K" at 46.783,101.61 h1